# Altium PCB PCB1 (First design).PcbDoc
Units mm, origin at the board's own origin, x right, y up, seen from the top; angles counter-clockwise.
Board outline 40 x 6.98 mm, 2 copper layers (Top Layer, Bottom Layer); 9 components, 6 nets, 22 pads, 12 vias.
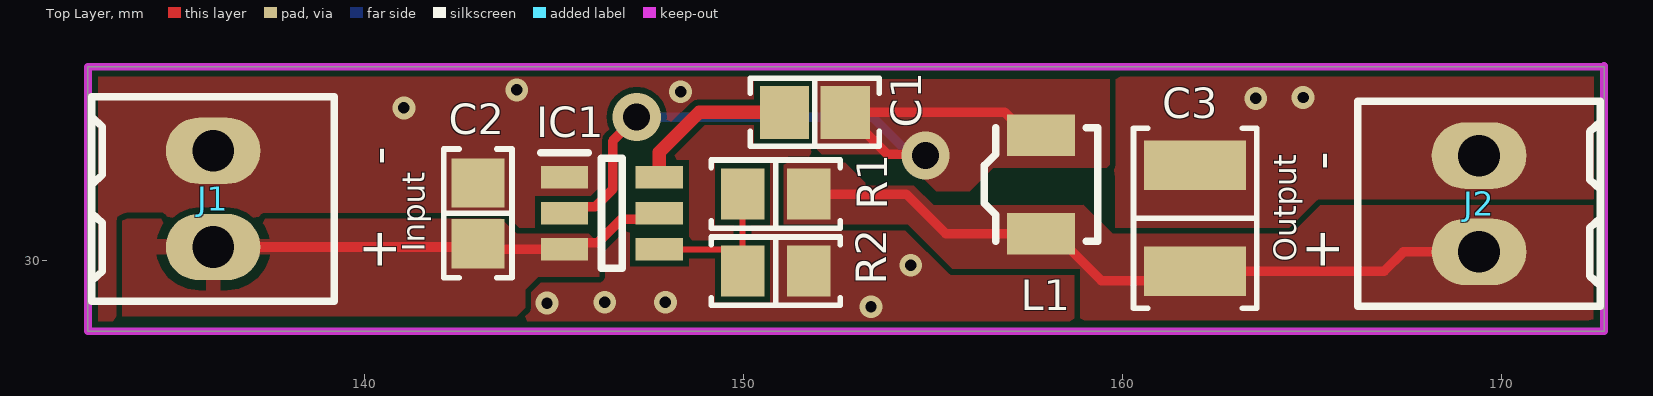
[diagram p0: Top Layer view]
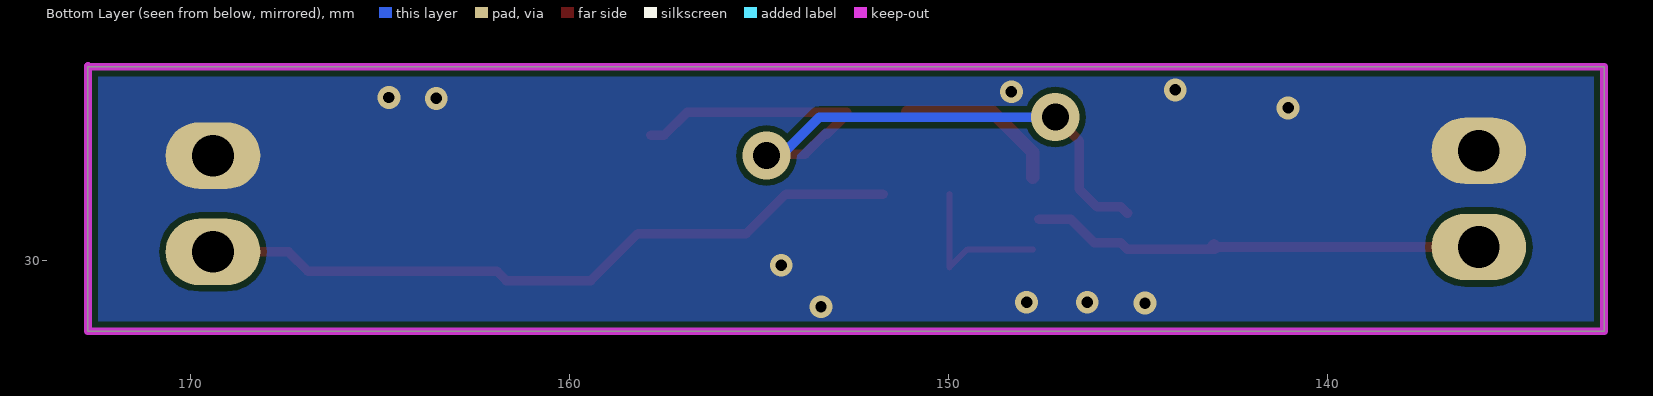
[diagram p1: Bottom Layer view, seen from below]
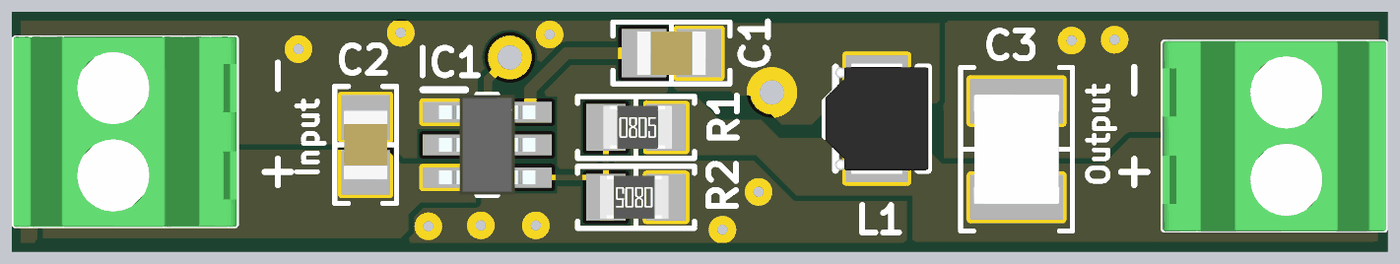
[diagram p2: 3D render of the assembled board from above, using the file's embedded part models]

## Layer stack, top to bottom
Top Solder: solder mask 0.0102, Solder Resist, Dk 3.5
Top Layer: signal copper 0.0356
Dielectric 1: dielectric 0.32, FR-4, Dk 4.8
Bottom Layer: signal copper 0.0356
Bottom Solder: solder mask 0.0102, Solder Resist, Dk 3.5

## Board outline
132.715,28.13 132.715,35.115 172.715,35.115 172.715,28.13

## Design rules (kind name [scope] priority, off if disabled: settings)
Clearance [All] p1: gap=0.16 ignorepadtopadclearanceinfootprint=FALSE
PolygonConnect [All] p1: connectstyle=Direct reliefconductorwidth=0.254 reliefentries=4 polygonreliefangle="90 Angle" airgapwidth=0.254
RoutingVias [All] p1: holewidth=0.3 width=0.6 viastyle="Through Hole" minholewidth=0.3 minwidth=0.6 maxholewidth=0.711 maxwidth=1.27
SilkToSilkClearance [All] p1: silktosilkclearance=0.1
SolderMaskExpansion [All] p1: expansion=0.102 istentingtop=FALSE
Width [All] p1: maxlimit=0.8 minlimit=0.16 preferedwidth=0.254
29 further rules are at their usual default settings.

## Components (designator, comment, footprint, x,y, rotation, side; value= is the part's Value field where it differs from the comment)
C1 "0.1µF" "CAP 0805_2012" 151.892,33.909 r0 top
C2 "22µF" "CAP 0805_2012" 143.002,31.242 r270 top
C3 "47µF" "CAP 1210_3225 - 2.8MM" 161.925,31.115 r270 top
IC1 "TPS561208DDCR" SOT95P280X110-6N 146.538,31.242 r0 top
J1 "=PartNumber" "TE 282834-2" 136.017,31.623 r90 top
J2 "=PartNumber" "TE 282834-2" 169.418,31.496 r270 top
L1 "4.7µH" "TDK SPM3012-LR" 157.861,32.004 r270 top
R1 "56.2 kOhms" "RES 0805_2012" 150.862,31.75 r0 top
R2 "10 kOhms" "RES 0805_2012" 150.862,29.718 r180 top

## Footprints (in the part's own frame and the unit in brackets; to place one, negate y for a bottom-side part, rotate by r counter-clockwise, add the part's x,y. Pads: shape width x height; smd on the part's side, far side on the other; paste and mask are expansions set on the pad)
"CAP 0805_2012" [mm] "Chip Capacitor, 2-Leads, Body 2.00x1.20mm, IPC Medium Density"
  rect 1.3x1.4 smd: 1(-0.8,0) 2(0.8,0)
  silkscreen extent -1.7,-0.9 1.7,0.9, body extent -1,-0.64 1,0.64, height 1.26
"CAP 1210_3225 - 2.8MM" [mm] "Chip Capacitor, 2-Leads, Body 3.20x2.50mm, IPC Medium Density"
  rect 1.3x2.7 smd: 1(-1.4,0) 2(1.4,0)
  silkscreen extent -2.37,-1.63 2.37,1.63, body extent -1.6,-1.25 1.6,1.25, height 2.8
"RES 0805_2012" [mm] "Chip Resistor, 2-Leads, Body 2.00x1.25mm, IPC Medium Density"
  rect 1.15x1.35 smd: 1(-0.875,0) 2(0.875,0)
  silkscreen extent -1.7,-0.9 1.7,0.9, body extent -0.95,-0.62 1.05,0.63, height 0.6
SOT95P280X110-6N [mm]
  rect 1.25x0.6 smd: 1(-1.25,0.95) 2(-1.25,0) 3(-1.25,-0.95) 4(1.25,-0.95) 5(1.25,0) 6(1.25,0.95)
  silkscreen extent -1.88,-1.45 0.28,1.6, body extent -1.4,-1.45 1.4,1.45, height 1.1
"TDK SPM3012-LR" [mm] "Inductor, 2-Leads, Body 3.00x3.00mm, IPC Medium Density"
  rect 1.1x1.8 smd: 1(-1.3,0) 2(1.3,0)
  silkscreen extent -1.5,-1.5 1.5,1.5, body extent -1.6,-1.5 1.6,1.5, height 1.2
"TE 282834-2" [mm]
  oval 1.75x2.5 hole 1.1: 1(-1.27,0) 2(1.27,0)
  silkscreen extent -2.7,-3.2 2.7,3.2, body extent -2.77,-3.25 2.77,3.25, height 10

## Part data
C1: library part CC0805MRX7R9BB104, "CAP CER 0.1UF 50V X7R 0805", Device Package="0805 (2012 Metric)", Manufacturer=Yageo, Operating Temperature="-55°C ~ 125°C", Supplier Part Number 1=311-4351-1-ND, Temperature Coefficient=X7R, Tolerance=±20%, Voltage - Rated=50V, Applications="General Purpose", Capacitance=0.1µF, ComponentLink1Description=Datasheet, ComponentLink1URL=https://www.yageo.com/upload/media/product/productsearch/datasheet/mlcc/UPY-GPHC_X7R_6.3V-to-50V_18.pdf, ComponentLink2Description="DigiKey Link", ComponentLink2URL=http://digikey.com/product-detail/en/yageo/CC0805MRX7R9BB104/311-4351-1-ND/8025440, LastUpdated="1/21/2020 12:03:06 AM", Lifecycle Status=Active, Minimum Order=1, Mounting Type="Surface Mount, MLCC", Package / Case="0805 (2012 Metric)", Packaging=TapeAndReel, Part Number=CC0805MRX7R9BB104, Part Status=Active, PartId=2475, Price=0.02, Series=CC, Size / Dimension="0.079\" L x 0.049\" W (2.00mm x 1.25mm)", Supplier 1=DigiKey, Thickness (Max)="0.037\" (0.95mm)"
C2: library part CL21A226KOQNNNG, "CAP CER 22UF 16V X5R 0805", Device Package="0805 (2012 Metric)", Manufacturer="Samsung Electro-Mechanics", Operating Temperature="-55°C ~ 85°C", Supplier Part Number 1=1276-7092-1-ND, Temperature Coefficient=X5R, Tolerance=±10%, Voltage - Rated=16V, Applications="General Purpose", Capacitance=22µF, ComponentLink1Description=Datasheet, ComponentLink1URL=//media.digikey.com/pdf/Data%20Sheets/Samsung%20PDFs/CL21A226KOQNNNG_Spec.pdf, ComponentLink2Description="DigiKey Link", ComponentLink2URL=http://digikey.com/product-detail/en/samsung-electro-mechanics/CL21A226KOQNNNG/1276-7092-1-ND/8021509, LastUpdated="1/21/2020 12:03:05 AM", Lifecycle Status=Active, Minimum Order=1, Mounting Type="Surface Mount, MLCC", Package / Case="0805 (2012 Metric)", Packaging=TapeAndReel, Part Number=CL21A226KOQNNNG, Part Status=Active, PartId=3000, Price=0.09, Series=CL, Size / Dimension="0.079\" L x 0.049\" W (2.00mm x 1.25mm)", Supplier 1=DigiKey, Thickness (Max)="0.055\" (1.40mm)"
C3: library part GRM32EC81C476KE15L, "CAP CER 47UF 16V X6S 1210", Device Package="1210 (3225 Metric)", Manufacturer="Murata Electronics", Operating Temperature="-55°C ~ 105°C", Supplier Part Number 1=490-10531-1-ND, Temperature Coefficient=X6S, Tolerance=±10%, Voltage - Rated=16V, Applications="General Purpose", Capacitance=47µF, ComponentLink1Description=Datasheet, ComponentLink1URL=https://search.murata.co.jp/Ceramy/image/img/A01X/G101/ENG/GRM32EC81C476KE15-01.pdf, ComponentLink2Description="DigiKey Link", ComponentLink2URL=http://digikey.com/product-detail/en/murata-electronics/GRM32EC81C476KE15L/490-10531-1-ND/5026469, LastUpdated="1/21/2020 12:30:50 AM", Lifecycle Status=Active, Minimum Order=1, Mounting Type="Surface Mount, MLCC", Package / Case="1210 (3225 Metric)", Packaging=TapeAndReel, Part Number=GRM32EC81C476KE15L, Part Status=Active, PartId=23627, Price=0.23, Series=GRM, Size / Dimension="0.126\" L x 0.098\" W (3.20mm x 2.50mm)", Supplier 1=DigiKey, Thickness (Max)="0.106\" (2.70mm)"
IC1: "Buck Switching Regulator IC Positive Adjustable 0.76V 1 Output 1A SOT-23-6 Thin, TSOT-23-6"
J1 J2: library part 282834-2, "TERM BLK 2P SIDE ENT 2.54MM PCB", Color=Green, Current=10A, Manufacturer="TE Connectivity AMP Connectors", Supplier Part Number 1=A98333-ND, Voltage=150V, ComponentLink1Description=Datasheet, ComponentLink1URL=https://www.te.com/commerce/DocumentDelivery/DDEController?Action=srchrtrv&DocNm=282834&DocType=Customer+Drawing&DocLang=English, ComponentLink2Description="DigiKey Link", ComponentLink2URL=http://digikey.com/product-detail/en/te-connectivity-amp-connectors/282834-2/A98333-ND/1150135, LastUpdated="1/15/2020 4:15:38 AM", Lifecycle Status=Active, Mating Orientation="Horizontal with Board", Minimum Order=1, Mounting Type="Through Hole", Number of Levels=1, Packaging=Bulk, Part Number=282834-2, Part Status=Active, Pitch="0.100\" (2.54mm)", Positions Per Level=2, Price=0.88, Series=Buchanan, Supplier 1=DigiKey, Wire Gauge="16-30 AWG", Wire Termination="Screw - Rising Cage Clamp"
L1: library part SPM3015T-4R7M-LR, "FIXED IND 4.7UH 1.8A 199.1 MOHM", Current - Saturation=3A, Current Rating (Amps)=1.8A, DC Resistance (DCR)="199.1mOhm Max", Device Package=Nonstandard, Inductance Frequency - Test=100kHz, Manufacturer="TDK Corporation", Operating Temperature="-40°C ~ 125°C", Supplier Part Number 1=445-174451-1-ND, Tolerance=±20%, ComponentLink1Description=Datasheet, ComponentLink1URL=https://product.tdk.com/info/en/catalog/datasheets/inductor_commercial_power_spm3015-lr_en.pdf?ref_disty=digikey, ComponentLink2Description="DigiKey Link", ComponentLink2URL=http://digikey.com/product-detail/en/tdk-corporation/SPM3015T-4R7M-LR/445-174451-1-ND/5962377, Height - Seated (Max)="0.047\" (1.20mm)", Inductance=4.7µH, LastUpdated="1/21/2020 3:26:10 AM", Lifecycle Status=Active, Material - Core=Metal, Minimum Order=1, Mounting Type="Surface Mount", Package / Case=Nonstandard, Packaging=TapeAndReel, Part Number=SPM3015T-4R7M-LR, Part Status=Active, PartId=139, Price=0.59, Series=SPM-LR, Shielding=Shielded, Size / Dimension="0.126\" L x 0.118\" W (3.20mm x 3.00mm)", Supplier 1=DigiKey, Type=Wirewound
R1: library part 7-2176093-1, "RES SMD 56.2K OHM 0.1% 1/4W 0805", Device Package="0805 (2012 Metric)", Manufacturer="TE Connectivity Passive Product", Operating Temperature="-55°C ~ 155°C", Power (Watts)="0.25W, 1/4W", Supplier Device Package=0805, Supplier Part Number 1=A110711CT-ND, Temperature Coefficient=±25ppm/°C, Tolerance=±0.1%, ComponentLink1Description=Datasheet, ComponentLink1URL=https://www.te.com/commerce/DocumentDelivery/DDEController?Action=srchrtrv&DocNm=1773272&DocType=DS&DocLang=English, ComponentLink2Description="DigiKey Link", ComponentLink2URL=http://digikey.com/product-detail/en/te-connectivity-passive-product/7-2176093-1/A110711CT-ND/4035066, Composition="Thin Film", Height - Seated (Max)="0.026\" (0.65mm)", LastUpdated="1/21/2020 1:40:37 AM", Lifecycle Status=Active, Minimum Order=1, Number of Terminations=2, Package / Case="0805 (2012 Metric)", Packaging=TapeAndReel, Part Number=7-2176093-1, Part Status=Active, PartId=47633, Price=0.15, Resistance="56.2 kOhms", Series="RP73P, Holsworthy", Size / Dimension="0.079\" L x 0.049\" W (2.00mm x 1.25mm)", Supplier 1=DigiKey
R2: library part AT0805FRE0710KL, "RES SMD 10K OHM 1% 1/8W 0805", Device Package="0805 (2012 Metric)", Manufacturer=Yageo, Operating Temperature="-55°C ~ 155°C", Power (Watts)="0.125W, 1/8W", Ratings=AEC-Q200, Supplier Device Package=0805, Supplier Part Number 1=YAG2132CT-ND, Temperature Coefficient=±50ppm/°C, Tolerance=±1%, ComponentLink1Description=Datasheet, ComponentLink1URL=http://www.yageo.com/documents/recent/PYu-AT_51_RoHS_L_5.pdf, ComponentLink2Description="DigiKey Link", ComponentLink2URL=http://digikey.com/product-detail/en/yageo/AT0805FRE0710KL/YAG2132CT-ND/5139580, Composition="Thin Film", Features="Anti-Sulfur, Automotive AEC-Q200, Moisture Resistant", Height - Seated (Max)="0.024\" (0.60mm)", LastUpdated="1/21/2020 1:49:26 AM", Lifecycle Status=Active, Minimum Order=1, Number of Terminations=2, Package / Case="0805 (2012 Metric)", Packaging=TapeAndReel, Part Number=AT0805FRE0710KL, Part Status=Active, PartId=29266, Price=0.10, Resistance="10 kOhms", Series=AT, Size / Dimension="0.079\" L x 0.049\" W (2.00mm x 1.25mm)", Supplier 1=DigiKey

## Via types
v1: diameter 0.6, hole 0.3, Top Layer to Bottom Layer, 10 vias
v2: diameter 1.27, hole 0.711, Top Layer to Bottom Layer, 2 vias

## Nets (pads, with @x,y where several pads share a name; then routed paths per layer and width w, separated by ;. In a path a pad name is that pad's centre, name@x,y a point inside that pad or via, vN(x,y) a via of type N, cw(c..) or ccw(c..) an arc to the next point about the centre after c; other vN are vias at no path point)
GND: C2.1 C3.1 IC1.1 J1.2 J2.1 R2.1
  other v1: 153.375,28.775 144.825,28.875 146.35,28.9 147.95,28.9 154.425,29.875 141.05,34.025 163.525,34.275 164.775,34.3 148.35,34.45 144.025,34.5
NetC1_1: C1.1 IC1.6 | length 4.4
  Top Layer w0.35: IC1.6 147.788,32.853 148.844,33.909 C1.1
NetC1_2: C1.2 IC1.2 L1.1 | length 19.8
  Top Layer w0.254: IC1.2 145.461,31.415 146.096,31.415 146.558,31.877 146.558,33.147 v2(147.193,33.782) ; v2(154.813,32.766) 154.775,32.804 153.797,32.804 153.265,33.336 153.215,33.336 152.692,33.859 C1.2 156.906,33.909 157.511,33.304 L1.1
  Bottom Layer w0.254: v2(147.193,33.782) 153.416,33.782 154.432,32.766 v2(154.813,32.766)
NetC2_2: C2.2 IC1.3 IC1.5 J1.1 | length 12.3
  Top Layer w0.254: J1.1 C2.2@142.913,30.353 ; IC1.5@147.631,31.085 146.782,31.085 146.162,30.465 145.461,30.465 IC1.3 C2.2@143.152,30.292 ; C2.2@142.913,30.353 142.974,30.292 C2.2@143.152,30.292 ; C2.2@142.913,30.353 C2.2 C2.2@143.152,30.292
NetC3_2: C3.2 J2.2 L1.2 R1.2 | length 18.9
  Top Layer w0.254: R1.2 154.305,31.75 155.351,30.704 L1.2 158.211,30.704 159.451,29.464 161.674,29.464 C3.2 166.915,29.715 167.426,30.226 J2.2
NetIC1_4: IC1.4 R1.1 R2.2 | length 4.3
  Top Layer w0.16: IC1.4 149.513,30.292 149.987,29.818 R1.1

## Polygon pours and split planes (outlines as drawn)
GND on Top Layer "GND_L01_P004" (solid, remove dead copper, pour order 4): 132.715,35.115 132.715,28.13 172.715,28.13 172.715,35.115
NetC1_2 on Top Layer "NETC1_2_L01_P003" (solid, pour order 3): 151.95,34.75 151.95,32.925 152.071,32.804 154.121,32.804 155.1,31.825 155.975,31.825 156.6,32.45 159.6,32.45 159.675,32.525 159.675,34.775 152,34.775 151.975,34.75
NetC3_2 on Top Layer "NETC3_2_L01_P002" (solid, pour order 2): 151.05,32.55 151.075,32.525 151.075,30.95 154.35,30.95 155.525,29.775 158.9,29.775 158.9,28.475 158.875,28.45 158.9,28.425 172.45,28.425 172.425,28.45 172.425,31.45 165.225,31.45 164.475,30.7 159.75,30.7 158.975,31.475 158.95,31.45 155.025,31.45 154.5,31.975 153.225,31.975 153.225,32.05 152.7,32.575 151.075,32.575
NetC2_2 on Top Layer (solid, pour order 1): 133.625,31.525 133.625,28.525 144.025,28.525 144.25,28.75 144.25,29.225 144.6,29.575 146.2,29.575 146.2,30.427 145.927,30.7 144.025,30.7 143.625,31.1 133.675,31.1 133.6,31.025
no net on Top Layer (solid, pour order 0): 133.625,31.525
GND on Bottom Layer "GND_L02_P005" (solid, pour order 5): 132.715,35.115 132.715,28.13 172.355,28.13 172.715,28.49 172.715,35.131 132.73,35.131

## Keep-outs
Keep-Out Layer:
  lines w0.2: 172.715,35.115 132.715,35.115 132.715,28.13 172.715,28.13 172.715,35.131

## Other copper
Top Layer:
  pour cut-out: 156.121,31.74 156.668,32.287 159.668,32.287 159.715,32.335 159.818,32.232 159.818,30.863 159.068,31.613 156.167,31.613 156.167,31.694

## Silkscreen, mask and mechanical layers (free items; w line width, h text height)
Top Overlay:
  text "-" at 140.843,32.512 h1 r90
  text "-" at 165.735,32.385 h1 r90
  text "Input" at 141.605,30.226 h0.6 r90
  text "Output" at 164.592,29.972 h0.6 r90
  text "+" at 140.843,29.718 h1 r90
  text "+" at 165.735,29.718 h1 r90

## Dimensions
172.715,35.115 to 172.715,28.13 on Mechanical 13
132.715,28.13 to 172.715,28.13 on Mechanical 13